# EAGLE board node (EAGLE 9.2.2)
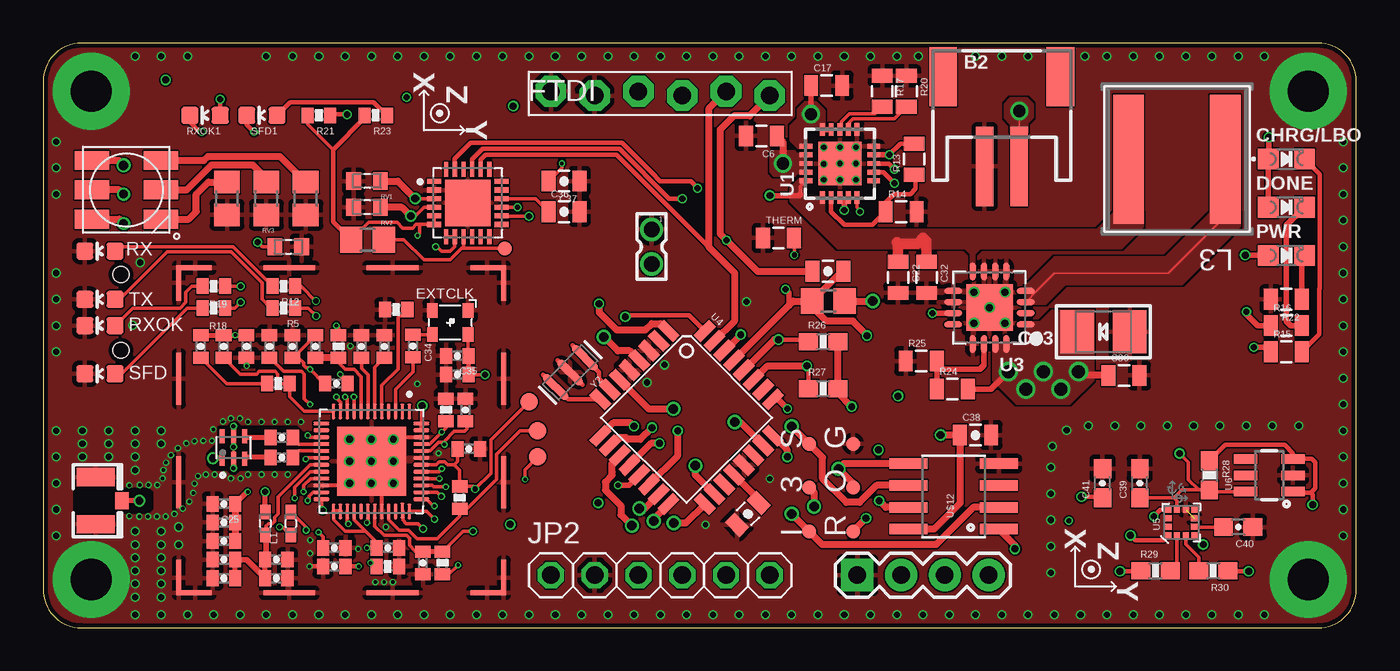
[diagram p0: board, top side]
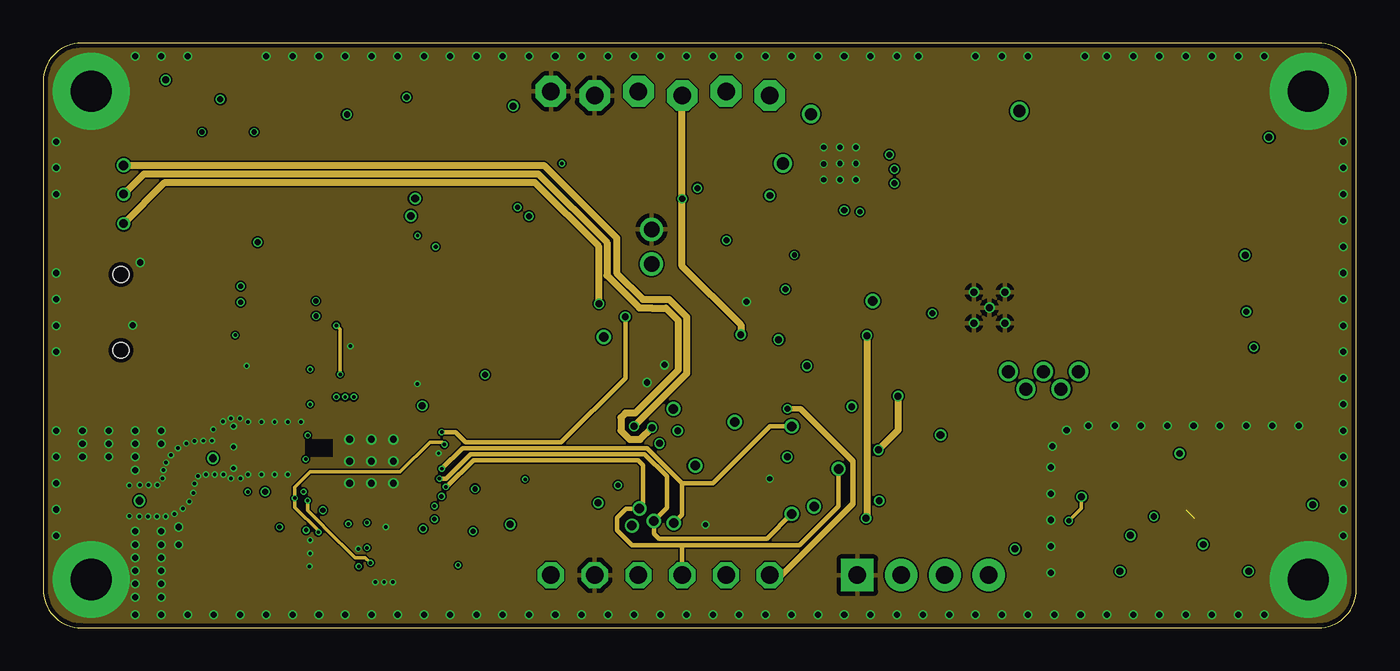
[diagram p1: board, inner layer Route2]
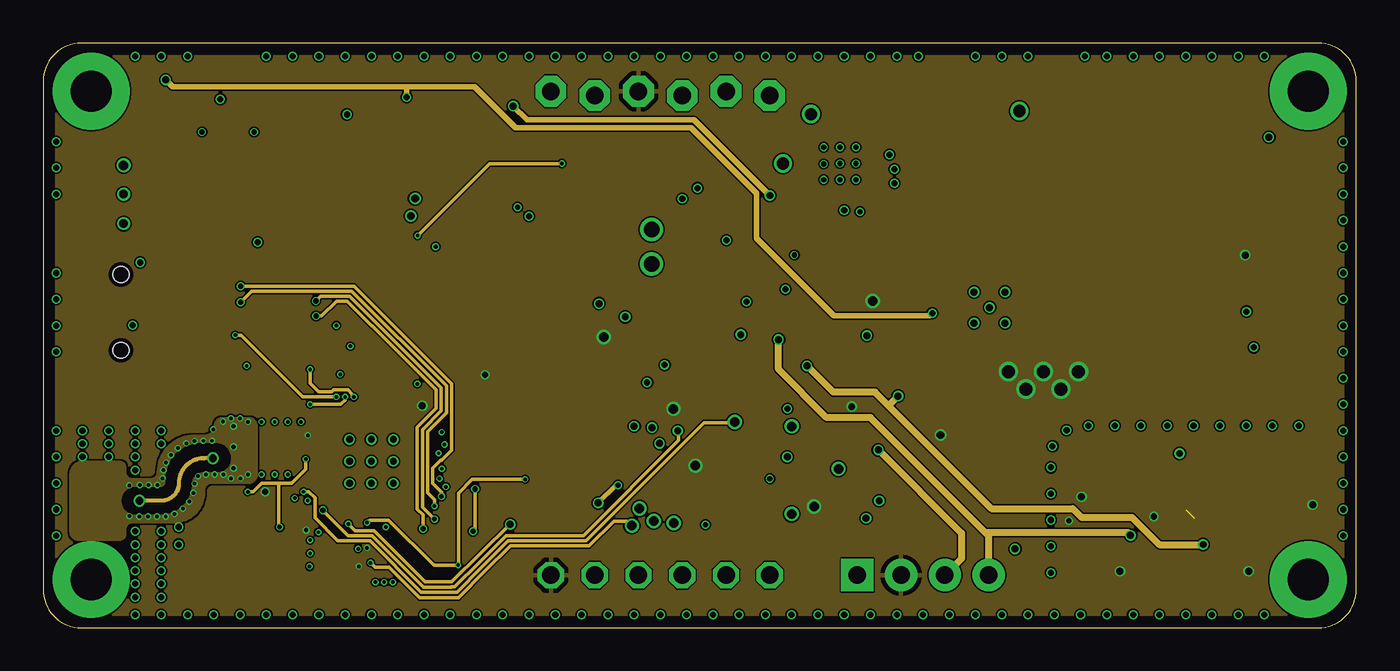
[diagram p2: board, inner layer Route15]
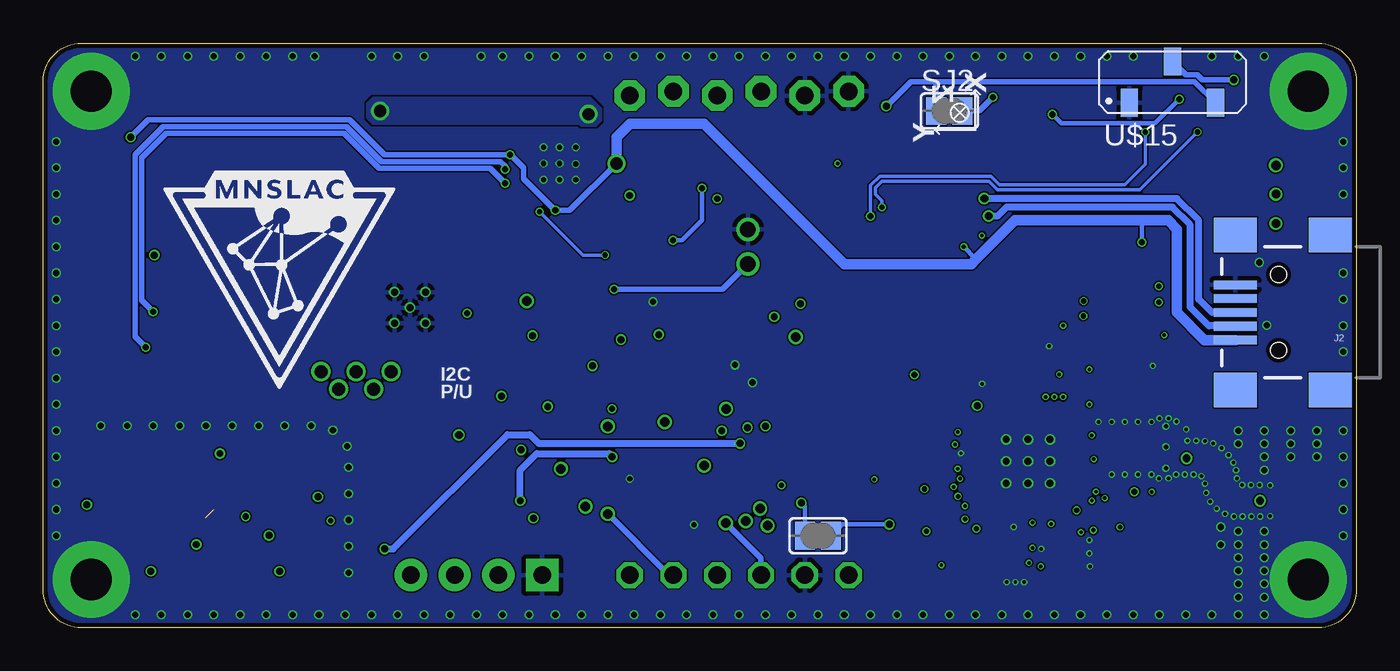
[diagram p3: board, bottom side, seen from below]

Size 76.2 x 33.91 mm. Coordinates in mm from the lower left corner, seen from the top.
Outline: 2.22,0 73.98,0 arc90 76.2,2.22 76.2,31.69 arc90 73.98,33.91 2.22,33.91 arc90 0,31.69 0,2.22 arc90 2.22,0
Copper layers (1+2*15+16): Top 0.035mm / dielectric 0.2mm / Route2 0.0175mm / dielectric 1.065mm / Route15 0.0175mm / dielectric 0.2mm / Bottom 0.035mm
Design rules "default *": minimum track width 3.5mil, minimum drill 0.2mm, track to track 3.5mil, track to pad 6mil, pad to pad 6mil, via to via 6mil, smd to smd 6mil, copper to edge 10mil, drill to drill 6mil, minimum pad ring 3mil, minimum via ring 3mil, stop-mask expansion 4mil, vias tented up to drill 0mil, thermal gap 10mil
Net classes: 1 single: width 0.293 mm, clearance 0.203 mm; 2 double: width 0.192 mm, clearance 0.178 mm; 3 ant: width 0.235 mm, clearance 0.203 mm

## Footprints (pad centres in the part's own frame; a part is rotated, then mirrored left to right if it is on the bottom)
TP08R = smd 0.8 x 0.8: TP 0,0
JSTPH2 = smd 1 x 4.6: 1 -1,-3.7; 2 1,-3.7 | smd 1.6 x 3.4: NC1 -3.4,1.5; NC2 3.4,1.5
BALUN_HHM1595A1 = smd 0.8 x 0.3: 1 -0.65,0.65; 2 -0.65,0; 3 -0.65,-0.65; 4 0.65,-0.65; 5 0.65,0; 6 0.65,0.65
0805-CAP = smd 0.8 x 1.2: 1 -0.9,0; 2 0.9,0
0402-CAP = smd 0.7 x 0.9: 1 -0.65,0; 2 0.65,0
0805 = smd 0.8 x 1.2: 1 -0.9,0; 2 0.9,0
EIA3528-21/B-R = smd 1.95 x 2.5: + 1.525,0; - -1.525,0
0603-CAP = smd 1.1 x 1: 1 -0.85,0; 2 0.85,0
CHIPLED_0805_NOOUTLINE = smd 1.2 x 1.2: A 0,-1.05; C 0,1.05
ASTXR-12 = smd 0.63 x 0.85: P$1 -1.04,-0.7; P$3 1.04,-0.7; P$4 1.04,0.7; P$6 -1.04,0.7
1X06-BIGLOCK = drill 1.016 pad 1.778 octagon: 1 -6.35,0.127; 2 -3.81,-0.127; 3 -1.27,0.127; 4 1.27,-0.127; 5 3.81,0.127; 6 6.35,-0.127
U.FL = smd 2.2 x 1.05: 1 0,1.375; 2 0,-1.375 | smd 0.8 x 1: 3 1.525,0
USB-MINIB = smd 2.5 x 0.5: D+ 2.5,0; D- 2.5,0.8; GND 2.5,-1.6; ID 2.5,-0.8; VBUS 2.5,1.6 | smd 2.5 x 2: MTN1 -3,4.5; MTN2 2.5,4.5; MTN3 -3,-4.5; MTN4 2.5,-4.5 | hole 0.9: 0,2.2; 0,-2.2
1X04 = drill 1.016 pad 1.88 square: 1 0,0 | drill 1.016 pad 1.88: 2 2.54,0; 3 5.08,0; 4 7.62,0
1X06 = drill 1.016 octagon: 1 -6.35,0; 2 -3.81,0; 3 -1.27,0; 4 1.27,0; 5 3.81,0; 6 6.35,0
WE-CBA_0402(W=2.2) = smd 0.85 x 0.6: 1 -0.675,0; 2 0.675,0
IND_TAIYO_NR8040 = smd 1.791 x 7.493: 1 -2.8,0; 2 2.8,0
RGBLED5050 = smd 2 x 1.1: 1 -2,1.7; 2 -2,0; 3 -2,-1.7; 4 2,-1.7; 5 2,0; 6 2,1.7
R0805 = smd 1.3 x 1.5: 1 -0.95,0; 2 0.95,0
0402-RES = smd 0.7 x 0.9: 1 -0.65,0; 2 0.65,0
0603-RES = smd 1.1 x 1: 1 -0.85,0; 2 0.85,0
WESURGE_0603_REFLOW = smd 0.85 x 1: 1 -0.775,0; 2 0.775,0
LED-0603 = smd 1 x 1: A 0,-0.877; C 0,0.877
SJ = smd 1.168 x 1.6: 1 -0.762,0; 2 0.762,0
PAD.03X.04 = smd 1.016 x 1.016: P$1 0,0
TP_15TH = drill 0.381 pad 0.61: P$1 0,0
QFN20_4MM = smd 0.73 x 0.28: P$1 -1.965,1; P$2 -1.965,0.5; P$3 -1.965,0; P$4 -1.965,-0.5; P$5 -1.965,-1; P$11 1.965,-1; P$12 1.965,-0.5; P$13 1.965,0; P$14 1.965,0.5; P$15 1.965,1 | smd 0.28 x 0.73: P$6 -1,-1.965; P$7 -0.5,-1.965; P$8 0,-1.965; P$9 0.5,-1.965; P$10 1,-1.965; P$16 1,1.965; P$17 0.5,1.965; P$18 0,1.965; P$19 -0.5,1.965; P$20 -1,1.965 | smd 2.5 x 2.5: P$21 0,0
QFN40P600X600X90-49N = smd 0.91 x 0.22: 1 -2.9,2.2; 2 -2.9,1.8; 3 -2.9,1.4; 4 -2.9,1; 5 -2.9,0.6; 6 -2.9,0.2; 7 -2.9,-0.2; 8 -2.9,-0.6; 9 -2.9,-1; 10 -2.9,-1.4; 11 -2.9,-1.8; 12 -2.9,-2.2; 25 2.9,-2.2; 26 2.9,-1.8; 27 2.9,-1.4; 28 2.9,-1; 29 2.9,-0.6; 30 2.9,-0.2; 31 2.9,0.2; 32 2.9,0.6; 33 2.9,1; 34 2.9,1.4; 35 2.85,1.8; 36 2.9,2.2 | smd 0.22 x 0.91: 13 -2.2,-2.9; 14 -1.8,-2.9; 15 -1.4,-2.9; 16 -1,-2.9; 17 -0.6,-2.9; 18 -0.2,-2.9; 19 0.2,-2.9; 20 0.6,-2.9; 21 1,-2.9; 22 1.4,-2.9; 23 1.8,-2.9; 24 2.2,-2.9; 37 2.2,2.9; 38 1.8,2.9; 39 1.4,2.9; 40 1,2.9; 41 0.6,2.9; 42 0.2,2.9; 43 -0.2,2.9; 44 -0.6,2.9; 45 -1,2.9; 46 -1.4,2.9; 47 -1.8,2.9; 48 -2.2,2.9 | smd 4 x 4: 49 0,0
PVQFN-16 = smd 1.05 x 0.35: 1 -2.1,0.975; 2 -2.1,0.325; 3 -2.1,-0.325; 4 -2.1,-0.975; 9 2.1,-0.975; 10 2.1,-0.325; 11 2.1,0.325; 12 2.1,0.975 | smd 0.35 x 1.05: 5 -0.975,-2.1; 6 -0.325,-2.1; 7 0.325,-2.1; 8 0.975,-2.1; 13 0.975,2.1; 14 0.325,2.1; 15 -0.325,2.1; 16 -0.975,2.1 | drill 0.4: P$18 0,0; P$19 -0.9,0.9; P$20 0.9,0.9; P$21 0.9,-0.9; P$22 -0.9,-0.9 | smd 2.7 x 2.7: THERMAL 0,0
TQFP32-08 = smd 1.27 x 0.559: 1 -4.293,2.8; 2 -4.293,2; 3 -4.293,1.2; 4 -4.293,0.4; 5 -4.293,-0.4; 6 -4.293,-1.2; 7 -4.293,-2; 8 -4.293,-2.8; 17 4.293,-2.8; 18 4.293,-2; 19 4.293,-1.2; 20 4.293,-0.4; 21 4.293,0.4; 22 4.293,1.2; 23 4.293,2; 24 4.293,2.8 | smd 0.559 x 1.27: 9 -2.8,-4.293; 10 -2,-4.293; 11 -1.2,-4.293; 12 -0.4,-4.293; 13 0.4,-4.293; 14 1.2,-4.293; 15 2,-4.293; 16 2.8,-4.293; 25 2.8,4.293; 26 2,4.293; 27 1.2,4.293; 28 0.4,4.293; 29 -0.4,4.293; 30 -1.2,4.293; 31 -2,4.293; 32 -2.8,4.293
LGA-12 = smd 0.375 x 0.35: 1 -0.75,0.75; 2 -0.75,0.25; 3 -0.75,-0.25; 4 -0.75,-0.75; 7 0.75,-0.75; 8 0.75,-0.25; 9 0.75,0.25; 10 0.75,0.75 | smd 0.35 x 0.375: 5 -0.25,-0.75; 6 0.25,-0.75; 11 0.25,0.75; 12 -0.25,0.75
SOT23-6 = smd 0.55 x 1.35: 1 -0.95,-1.375; 2 0,-1.375; 3 0.95,-1.375; 4 0.95,1.375; 5 0,1.375; 6 -0.95,1.375
SMS-255F = smd 0.3 x 2.06: P$1 0,0.88; P$6 18.85,0.88; P$7 18.85,17.97; P$12 0,17.97 | smd 1.91 x 0.3: P$2 0.955,0; P$5 17.886,0; P$8 17.886,18.85; P$11 0.955,18.85 | smd 3 x 0.3: P$3 6.41,0; P$4 12.41,0; P$9 12.41,18.85; P$10 6.41,18.85 | smd 0.3 x 3: P$13 0,6.41; P$14 0,12.41; P$15 18.85,12.41; P$16 18.85,6.41
QFN50P400X400X80-25N = smd 0.82 x 0.26: 1 -1.955,1.25; 2 -1.955,0.75; 3 -1.955,0.25; 4 -1.955,-0.25; 5 -1.955,-0.75; 6 -1.955,-1.25; 13 1.955,-1.25; 14 1.955,-0.75; 15 1.955,-0.25; 16 1.955,0.25; 17 1.955,0.75; 18 1.955,1.25 | smd 0.26 x 0.82: 7 -1.25,-1.955; 8 -0.75,-1.955; 9 -0.25,-1.955; 10 0.25,-1.955; 11 0.75,-1.955; 12 1.25,-1.955; 19 1.25,1.955; 20 0.75,1.955; 21 0.25,1.955; 22 -0.25,1.955; 23 -0.75,1.955; 24 -1.25,1.955 | smd 2.65 x 2.68: 25 0,0
SOIC-8 = smd 0.61 x 2.21: 1 -1.905,-2.616; 2 -0.635,-2.616; 3 0.635,-2.616; 4 1.905,-2.616; 5 1.905,2.616; 6 0.635,2.616; 7 -0.635,2.616; 8 -1.905,2.616
JS102011JCQN = smd 1 x 1.6: P$1 -2.5,-1.2; P$2 0,1.2; P$3 2.5,-1.2
332-02 = drill 0.9 pad 1.27: 1 0,-1; 2 0,1
RESONATOR-SMD = smd 0.45 x 1.905: 1 -1.2,0; 2 0,0; 3 1.2,0

## Placement (x,y rotation side)
3  TPSQTP08R  [TP08R]  44.45,8.13 90 top
B2  JST 2-PH  [JSTPH2]  55.63,30.45 0 top
BALUN1  HHM1595A1  [BALUN_HHM1595A1]  11.05,10.45 90 top
C1  0.1uF  [0805-CAP]  45.54,20.68 0 top
C2  0.1uF  [0805-CAP]  40.89,6.6 225 top
C3  0.1uF  [0402-CAP]  24.04,14.68 180 top
C4  0.1uF  [0402-CAP]  22.03,3.76 270 top
C5  0.1uF  [0402-CAP]  24.51,12.64 90 top
C6  10uF  [0805]  41.68,28.52 180 top
C7  0.1uF  [0402-CAP]  14.48,16.32 90 top
C8  0.1uF  [0402-CAP]  19.81,16.32 90 top
C9  0.1uF  [0402-CAP]  18.48,16.32 90 top
C10  0.1uF  [0402-CAP]  16.89,4.64 0 top
C11  0.1uF  [0402-CAP]  11.81,16.32 270 top
C12  0.1uF  [0402-CAP]  13.14,16.32 90 top
C13  12pf  [0402-CAP]  13.84,11.02 0 top
C14  12pf  [0402-CAP]  13.84,9.88 0 top
C15  18pF  [0402-CAP]  10.48,16.32 270 top
C16  820pF  [0402-CAP]  9.14,16.32 270 top
C17  10uF  [0805]  45.47,31.45 0 top
C18  1p2  [0402-CAP]  15.81,16.32 270 top
C19  27pF  [0402-CAP]  17.02,14.16 0 top
C20  0.1uF  [0402-CAP]  24.7,10.38 180 top
C21  0.1uF  [0402-CAP]  20,4.64 0 top
C22  10uF  [0805]  49.61,20.32 270 top
C23  12nF  [0402-CAP]  10.49,5.03 180 top
C24  330nF  [0402-CAP]  10.49,6.11 180 top
C25  100nF  [0402-CAP]  10.49,7.19 180 top
C26  47uF  [0402-CAP]  16.89,3.56 0 top
C27  12nF  [0402-CAP]  13.53,3.95 0 top
C28  330nF  [0402-CAP]  10.49,2.87 180 top
C29  100nF  [0402-CAP]  10.49,3.95 180 top
C30  2.2uF  [0805]  62.71,14.63 0 top
C31  22uF  [0402-CAP]  13.53,2.87 0 top
C32  0.1uF  [0805]  51.26,20.32 270 top
C33  100uF/6V - https://www.digikey.com/product-detail/en/avx-corporation/F930G107MBA/478-8135-1-ND/4005827  [EIA3528-21/B-R]  61.52,17.17 180 top
C34  2200pF  [0402-CAP]  21.46,16.33 90 top
C35  100nF  [0402-CAP]  24.03,15.77 0 top
C36  4.7uF  [0805-CAP]  30.23,24.13 0 top
C37  2uF  [0805-CAP]  30.23,25.91 180 top
C38  1uF  [0805-CAP]  54.1,11.18 0 top
C39  0.1uF  [0603-CAP]  63.63,8.38 90 top
C40  0.1uF  [0603-CAP]  69.34,5.84 180 top
C41  0.1uF  [0603-CAP]  61.47,8.38 90 top
CHRG/LBO  ORANGE  [CHIPLED_0805_NOOUTLINE]  72.14,27.18 270 top
CPRST  TPSQTP08R  [TP08R]  26.8,22 0 top
DONE  GREEN  [CHIPLED_0805_NOOUTLINE]  72.14,24.38 270 top
EXTCLK  38.400MHz  [ASTXR-12]  23.62,17.7 180 top
FTDI  [1X06-BIGLOCK]  35.81,30.99 0 top
G  TPSQTP08R  [TP08R]  46.99,10.67 90 top
I  TPSQTP08R  [TP08R]  44.45,5.59 90 top
J1  U.FL  [U.FL]  3.05,7.37 0 top
J2  USBSMD  [USB-MINIB]  4.52,18.29 180 bottom
JP1  [1X04]  47.24,3.05 0 top
JP2  [1X06]  35.81,3.05 0 top
L1  BLM15AG601SN1D  [WE-CBA_0402(W=2.2)]  14.38,6.05 90 top
L2  BLM15AG601SN1D  [WE-CBA_0402(W=2.2)]  12.89,6.05 90 top
L3  NR8040T6R8N  [IND_TAIYO_NR8040]  65.79,27.18 180 top
LED1  RGBLED5050  [RGBLED5050]  4.83,25.4 0 top
O  TPSQTP08R  [TP08R]  46.99,8.13 90 top
PWR  GREEN  [CHIPLED_0805_NOOUTLINE]  72.14,21.59 270 top
R  TPSQTP08R  [TP08R]  46.99,5.59 90 top
R1  100  [R0805]  12.95,24.89 90 top
R2  100  [R0805]  15.24,24.89 90 top
R3  100  [R0805]  10.67,24.89 90 top
R4  10K  [0402-RES]  20,3.56 0 top
R5  470  [0402-RES]  13.97,18.54 180 top
R6  11K 1%  [0402-RES]  20.49,18.45 0 top
R7  100K  [0402-RES]  23.38,12.64 270 top
R8  10k  [0402-RES]  24.17,7.54 270 top
R9  10k  [0402-RES]  23.18,3.76 270 top
R10  270  [0402-RES]  13.65,14.16 0 top
R11  16k  [0402-RES]  17.14,16.32 270 top
R12  470  [0402-RES]  13.97,19.81 180 top
R13  270K  [0805]  50.55,27.18 90 top
R14  100K  [0805]  49.78,24.13 0 top
R15  1K  [0805]  72.14,16 0 top
R16  1K  [0805]  72.14,17.53 0 top
R17  2.0K  [0805]  48.69,31.11 270 top
R18  470  [0402-RES]  9.91,18.54 180 top
R19  470  [0402-RES]  9.91,19.81 180 top
R20  100K  [0805]  50.09,31.11 270 top
R21  470  [0402-RES]  16,29.72 180 top
R22  1K  [0805]  72.14,19.05 180 top
R23  470  [0402-RES]  19.3,29.72 180 top
R24  1.15M  [0805]  52.76,13.84 0 top
R25  205K  [0805]  50.95,15.47 0 top
R26  4.7K  [0603-RES]  45.26,16.59 0 top
R27  4.7K  [0603-RES]  45.26,13.87 0 top
R28  68  [0603-RES]  67.67,8.84 270 top
R29  10K  [0603-RES]  64.54,3.3 0 top
R30  10K  [0603-RES]  67.89,3.3 180 top
RST  10k  [R0805]  45.57,18.95 0 top
RST1  4.7K  [R0805]  18.82,22.5 180 top
RV1  WE-VE_0603_REFLOW  [WESURGE_0603_REFLOW]  18.8,25.91 180 top
RV2  WE-VE_0603_REFLOW  [WESURGE_0603_REFLOW]  18.8,24.38 180 top
RV3  WE-VE_0603_REFLOW  [WESURGE_0603_REFLOW]  14.22,22.1 0 top
RX  [LED-0603]  3.3,21.84 90 top
RXOK  [LED-0603]  3.3,17.53 90 top
RXOK1  [LED-0603]  9.4,29.72 90 top
S  TPSQTP08R  [TP08R]  44.45,10.67 90 top
SFD  [LED-0603]  3.3,14.73 90 top
SFD1  [LED-0603]  12.7,29.72 90 top
SJ1  [SJ]  31.24,5.33 0 bottom
SJ2  [SJ]  23.62,29.97 0 bottom
THERM  15K  [0805]  42.67,22.61 0 top
TP1  TEST-POINT3X4  [PAD.03X.04]  28.7,11.43 90 top
TP2  TEST-POINT3X4  [PAD.03X.04]  28.7,9.91 90 top
TP3  VDD_TP  [TP_15TH]  65.94,10.11 90 top
TP3-OTP  TEST-POINT3X4  [PAD.03X.04]  28.19,13.11 90 top
TX  [LED-0603]  3.3,19.05 90 top
U1  MCP73871  [QFN20_4MM]  46.23,26.92 90 top
U2  DW1000-I  [QFN40P600X600X90-49N]  19.05,9.65 270 top
U3  TPS61090RSAR  [PVQFN-16]  54.91,18.57 180 top
U4  ATMEGA328  [TQFP32-08]  37.34,12.19 315 top
U5  LSM303C  [LGA-12]  66.04,6.1 90 top
U6  LM3880  [SOT23-6]  71.15,8.84 90 top
U$1  MNSLAC0.25  [MNSLAC-0.25]  69.22,25.53 0 bottom
U$6  SMS-255F  [SMS-255F]  7.87,2.03 0 top
U$7  HEATSINK  [LTN20069]  24.38,4.57 0 bottom
U$8  CP2105  [QFN50P400X400X80-25N]  24.64,24.64 0 top
U$12  23A640  [SOIC-8]  52.83,7.62 90 top
U$15  SWITCH_SPDTJS102011JCQN  [JS102011JCQN]  10.67,31.65 0 bottom
X2  332-02  [332-02]  35.31,22.1 180 top
Y2  8MHZ  [RESONATOR-SMD]  30.58,14.81 225 top

## Library data of the parts
3 CPRST G I O R S = testpad
B2 C33 CHRG/LBO DONE PWR U1 U3 = microbuilder
BALUN1 = MainLib; DESCRIPTION: Baluns 50/100ohm, 3-8GHz Ultrawideband Balun; DIGI-KEY_PART_NUMBER: 445-3387-1-ND; DIGI-KEY_PURCHASE_URL: https://www.digikey.com/product-detail/en/tdk-corporation/HHM1595A1/445-3387-1-ND/1641780?utm_source=snapeda&utm_medium=aggregator&utm_campaign=symbol; MF: TDK; MP: HHM1595A1; PACKAGE: 0805 TDK
C1 C2 C36-C38 = SparkFun-Capacitors; PROD_ID: CAP-11625
C3-C32 C34 C35 R4-R25 THERM TP1-TP3 TP3-OTP = SparkFun-Passives
C39-C41 = SparkFun-Capacitors; PROD_ID: CAP-00810
EXTCLK U$1 U$6-U$8 U$12 U$15 = MainLib
FTDI J1 JP2 LED1 = adafruit
J2 = SparkFun-Connectors; PROD_ID: CONN-08193
JP1 = SparkFun-Connectors
L1 L2 RV1-RV3 = Wurth_Elektronik_Passive_rev15e
L3 = MainLib; MANUFACTURER_PART_NUMBER: NR8040T6R8N; VENDOR: TAIYO YUDEN
R1-R3 RST RST1 = resistor
R26 R27 = SparkFun-Resistors; PROD_ID: RES-07857
R28 = SparkFun-Passives; PROD_ID: RES-07860
R29 R30 = SparkFun-Resistors; PROD_ID: RES-00824
RX RXOK RXOK1 SFD SFD1 TX = SparkFun-LED
SJ1 SJ2 = jumper
U2 = MainLib; AVAILABILITY: Unavailable; DESCRIPTION: Ic Rf Txrx 802.15.4 48-Qfn; MF: Decawave Limited; MP: DW1000-I; PACKAGE: QFN-48 Decawave; PRICE: None
U4 = SparkFun
U5 = SparkFun-DigitalIC; PROD_ID: IC-12557
U6 = SparkFun-DigitalIC; PROD_ID: IC-12558
X2 = con-garry
Y2 = SparkFun-FreqCtrl; PROD_ID: XTAL-08895

## Nets
3.3V: 3.TP C3.1 C21.1 C26.2 C30.1 C33.+ C35.2 C38.1 C41.1 EXTCLK.P$6 FTDI.3 JP1.2 JP2.1 L1.2 L2.2 PWR.A R24.2 R26.2 R27.2 R28.1 R29.1 R30.1 RST.2 U2.15 U2.25 U2.26 U2.28 U2.47 U2.48 U3.1 U3.15 U3.16 U4.4 U4.6 U4.18 U5.10 U6.1 U6.3 U$12.8
!CS_MAG: R30.2 U5.3
!CS_XL: R29.2 U5.2
!EXTCS: JP2.6 U4.25
!RST: SJ1.2 U2.27
!SPICS: U2.24 U4.14
!SRAMCS: U4.12 U$12.1
!SRAMHOLD: U4.24 U$12.7
A3: U4.26
A6: U4.19
A7: U4.22
ANT [ant]: BALUN1.1 J1.3
AREF: C2.1 U4.20
BAL_N [single]: BALUN1.3 C14.1
BAL_P [single]: BALUN1.4 C13.1
BLU: LED1.3 U4.1
CLKTUNE: C18.2 R11.2 U2.8
CPVIO: C37.2 R21.2 R23.2 RST1.2 U$8.5 U$8.6
D4: U4.2
D+: J2.D+ RV1.1 U$8.3
D-: J2.D- RV2.1 U$8.4
DRDY_MAG: U5.11
DTR: C1.1 FTDI.6 U$8.23
DWRST: SJ1.1 U4.13
EXTON: U2.21 U4.23
GND: B2.1 BALUN1.2 BALUN1.5 C2.2 C3.2 C4.2 C5.2 C6.2 C7.2 C8.2 C9.2 C10.2 C11.2 C12.2 C17.2 C20.1 C21.2 C22.2 C23.2 C24.2 C25.2 C26.1 C27.2 C28.2 C29.2 C30.2 C31.2 C32.2 C33.- C35.1 C36.2 C37.1 C38.2 C39.2 C40.1 C41.2 EXTCLK.P$1 EXTCLK.P$3 FTDI.1 FTDI.2 G.TP J1.1 J1.2 J2.GND JP1.1 JP2.2 R1.1 R2.1 R3.1 R4.2 R6.1 R7.1 R14.2 R17.1 R20.1 R22.2 R25.1 RV1.2 RV2.2 RV3.2 RX.C RXOK.C SFD.C THERM.1 TX.C U1.P$10 U1.P$11 U1.P$21 U2.22 U2.32 U2.43 U2.46 U2.49 U3.5 U3.6 U3.7 U3.9 U3.10 U3.13 U3.P$18 U3.P$19 U3.P$20 U3.P$21 U3.P$22 U3.THERMAL U4.3 U4.5 U4.21 U5.6 U5.8 U6.2 U$6.P$1 U$6.P$2 U$6.P$3 U$6.P$4 U$6.P$5 U$6.P$6 U$6.P$7 U$6.P$8 U$6.P$9 U$6.P$10 U$6.P$11 U$6.P$12 U$6.P$13 U$6.P$14 U$6.P$15 U$6.P$16 U$8.2 U$8.25 U$12.4 U$15.P$1 X2.1 Y2.2
GPIO0: R19.1 U2.38
GPIO1: R18.1 U2.37
GPIO2: R12.1 U2.36
GPIO3: R5.1 U2.35
GPIO4: U2.34
GPIO5: R8.2 TP1.P$1 U2.33
GPIO6: R9.2 TP2.P$1 U2.30
GRN: LED1.1 U4.9
IQR: R7.2 U2.45 U4.32
MISO: I.TP JP2.5 U2.40 U4.16 U$12.2
MOSI: JP2.4 O.TP U2.39 U4.15 U$12.5
N$1: U4.8 Y2.3
N$2: LED1.5 R1.2
N$3: LED1.6 R2.2
N$4: LED1.4 R3.2
N$5: R5.2 TX.A
N$6: R12.2 RX.A
N$7: C16.2 R10.1
N$8: R13.1 R14.1 U1.P$2
N$9: U4.7 Y2.1
N$10: C5.1 C10.1 U2.20 U2.44
N$11: R16.1 U1.P$7
N$12: R15.1 U1.P$8
N$13: THERM.2 U1.P$5
N$14: C19.2 R11.1
N$15: DONE.C R16.2
N$16: R17.2 U1.P$13
N$17: CHRG/LBO.C R15.2
N$18: R20.2 U1.P$12
N$19: CPRST.TP RST1.1 U$8.9
N$20: L3.1 U3.3 U3.4
N$21: R18.2 SFD.A
N$22: PWR.C R22.1
N$23: R24.1 R25.2 U3.14
N$24: R19.2 RXOK.A
N$25: C34.1 U2.3
N$26: C34.2 EXTCLK.P$4
N$27: U2.4
N$28: C40.2 U5.5
N$29: C36.1 U$8.16
N$30: SJ2.2 U3.11 U$15.P$2
N$31: R21.1 RXOK1.A
N$32: R23.1 SFD1.A
RED: LED1.2 U4.10
RESET: C1.2 R.TP RST.1 U4.29 X2.2
RF_N [double]: C14.2 U2.17
RF_P [double]: C13.2 U2.16
RX_LED: SFD1.C U$8.14
RXD: FTDI.4 U4.30 U$8.21
SCK: JP2.3 S.TP U2.41 U4.17 U$12.6
SCL: JP1.4 R26.1 U4.28 U5.1
SDA: JP1.3 R27.1 U4.27 U5.4
SYNC: U2.29
TX_LED: RXOK1.C U$8.15
TXD: FTDI.5 U4.31 U$8.20
VBUS: C6.1 CHRG/LBO.A DONE.A J2.VBUS R13.2 RV3.1 U1.P$3 U1.P$4 U1.P$9 U1.P$17 U1.P$18 U1.P$19 U$8.7 U$8.8
VCC-ISO: C22.1 C32.1 L3.2 SJ2.1 U1.P$1 U1.P$20 U3.8 U$15.P$3
VCOTUNE: C15.2 R10.2 U2.12
VDDCLK: C7.1 C18.1 C19.1 U2.9
VDDIF: C9.1 U2.7
VDDIO: C4.1 C20.2 R8.1 R9.1 TP3-OTP.P$1 U2.31 U2.42
VDDMS: C8.1 U2.6
VDDPA1: C23.1 C24.1 C25.1 L1.1 U2.18
VDDPA2: C27.1 C28.1 C29.1 C31.1 L2.1 U2.19
VDDSYN: C12.1 U2.10
VDDVCO: C11.1 C15.1 C16.1 U2.11
VDELAY: C39.1 R28.2 TP3.P$1 U5.9 U6.6
VLIPO: B2.2 C17.1 U1.P$14 U1.P$15 U1.P$16
VREF: R6.2 U2.5
WAKEUP: R4.1 U2.23 U4.11

## Tracks (layer width: path | path; a pad name or v marks a point on that pad's centre or on a via)
3.3V  (via drill 0.2, 0.25, 0.3, 0.35, 0.4, 0.45, 0.55, 0.75)
  Top 0.203: U2.15 15.46,11.05 v15.35,11.16 | U2.48 21.95,12.92 v22,12.88 | U2.25 16.85,6.26 17.53,5.59 18.73,5.59 | U2.28 18.05,6.26 18.73,5.59 | 19.35,4.92 19.35,4.96 18.73,5.59 | L1.2 15.27,5.83 v15.27,5.66 | EXTCLK.P$6 24.66,15.81 arc45 C35.2 | v25.65,14.68 C3.1
  Top 0.254: U2.25 U2.26 | U2.47 U2.48 | 19.35,4.92 C21.1 v18.8,4.64 | C26.2 v18.32,3.56 | 73.56,7.82 73.81,8.08 73.81,9.6 73.62,9.79 U6.3 72.52,10.13 72.03,10.62 68.59,10.62 R28.1 | 73.56,7.82 72.59,7.82 U6.1 | v73.66,7.14 73.66,7.72 73.56,7.82 | v69.95,3.28 68.77,3.28 R30.1 | v62.48,3.28 63.67,3.28 R29.1 | C41.1 61.41,7.59 v60.25,7.59 | v64.44,6.45 64.83,6.85 U5.10 | C3.1 24.69,15.78 24.66,15.81
  Top 0.293: L2.2 v12.89,7.89
  Top 0.305: v69.75,21.61 71.06,21.61 PWR.A | R24.2 54.99,13.84 v56.01,14.86
  Top 0.406: RST.2 v48.13,18.95 | 3.TP 44.73,7.85 v44.73,7.04 | U4.18 37.85,8.86 v37.85,9.4 | U4.6 35.13,12.7 v36.58,12.7 | U4.4 34.04,16.05 33.35,16.05 v32.54,16.87 | v46.91,12.83 46.11,13.63 R27.2 R26.2 | U$12.8 51.69,5.71 53.2,7.23 C38.1 v52.07,11.18 | C30.1 60.3,14.63 v60.07,14.86
  Route2 0.203: v60.25,7.59 60.25,6.93 v59.51,6.2
  other vias: 58.04,14.86 59.05,13.84 57.02,13.84
  pour Route15 (rank 2): 0.76,3.05 0.76,30.86 arc-90 3.05,33.15 73.15,33.15 arc-90 75.44,30.86 75.44,3.05 arc-90 73.15,0.76 3.05,0.76 arc-90
  pour Top (no thermals): 60.99,18.41 58.5,18.41 57.84,17.75 56.97,17.75 56.97,16.54 55.07,16.54 55.07,14.35 56.46,12.95 59.59,12.95 60.99,14.35
!CS_MAG
  Top 0.203: U5.3 66.29,4.83 67.04,4.08 R30.2
!CS_XL
  Top 0.203: U5.2 65.79,3.7 R29.2
!EXTCS  (via drill 0.35)
  Top 0.305: U4.25 42.63,13.25 v43.18,12.7
  Route2 0.305: v43.18,12.7 43.94,12.7 46.99,9.65 46.99,7.2 42.84,3.05 JP2.6
!RST  (via drill 0.2, 0.4)
  Top 0.203: U2.27 17.65,6.09 v17.71,6.03
  Route15 0.203: v17.71,6.03 18.11,5.63 19.2,5.63 22.17,2.66 23.71,2.66 v27.1,5.99
  Bottom 0.254: SJ1.2 29.82,5.99 v27.1,5.99
!SPICS  (via drill 0.3, 0.4)
  Top 0.203: U2.24 16.15,6.89 v16.23,6.81
  Top 0.406: U4.14 36.83,9.99 v36.83,11.43
  Route15 0.203: v16.23,6.81 17.7,5.33 19.08,5.33 22.07,2.35 23.69,2.35 23.71,2.37 23.76,2.37 23.88,2.37 23.97,2.46 25.24,3.71 26.87,5.33 31.34,5.33 36.88,10.87 36.88,11.38 v36.83,11.43
!SRAMCS  (via drill 0.4)
  Top 0.406: U$12.1 56.39,4.78 v56.39,4.57 | v35.76,10.69 35.27,10.69 U4.12
  Bottom 0.406: v35.76,10.69 47.45,10.69 47.95,11.2 49.26,11.2 55.88,4.57 v56.39,4.57
!SRAMHOLD  (via drill 0.4)
  Top 0.406: U$12.7 48.9,6.99 v48.51,7.37 | v43.18,9.91 43.18,10.31 U4.24
  Bottom 0.406: v48.51,7.37 48.51,9.14 47.56,10.1 43.36,10.1 v43.18,9.92 v43.18,9.91
ANT  (via drill 0.45)
  Top 0.293: BALUN1.1 10.37,9.83 v9.86,9.83 | v5.59,7.37 J1.3
  Route15 0.235: v9.86,9.83 9.32,9.83 arc90 7.87,8.38 arc-90 6.86,7.37 v5.59,7.37
  cutout Top: 1.78,8.13 6.1,8.13 6.35,7.87 6.35,6.86 6.1,6.6 1.78,6.6
AREF
  Top 0.406: U4.20 41.53,7.43 C2.1
BAL_N
  Top 0.293: C14.1 11.78,9.88 BALUN1.3
BAL_P
  Top 0.293: C13.1 11.78,11.02 BALUN1.4
BLU  (via drill 0.4, 0.5)
  Top 0.406: LED1.3 4.42,23.7 v4.67,23.44 | v32.26,18.8 32.26,18.29 33.27,17.27 34.95,17.27 35.32,17.64 35.85,17.64 U4.1
  Route2 0.406: v4.67,23.44 7.06,25.83 28.52,25.83 32.22,22.14 32.22,18.84 v32.26,18.8
CLKTUNE
  Top 0.203: U2.8 18.45,14.57 18.03,14.99 17.53,14.99 17.14,15.37 R11.2
  Top 0.406: R11.2 C18.2
CPVIO  (via drill 0.2)
  Top 0.203: U$8.5 U$8.6 21.85,23.39 | RST1.2 18.88,23.51 20.53,23.51 20.85,23.18 21.44,23.18 21.65,23.39 21.85,23.39 | 21.85,23.39 21.85,22.87 v21.73,22.75 | v30.1,26.92 30.1,26.68 C37.2 | R21.2 15.35,29.2 16.82,27.74
  Top 0.254: RST1.2 16.82,23.56 16.82,27.74 18.65,29.58 R23.2
  Route15 0.203: v21.73,22.75 25.91,26.92 v30.1,26.92
D+  (via drill 0.45)
  Top 0.203: v21.59,24.89 U$8.3
  Top 0.406: RV1.1 20.57,25.91 v21.59,24.89
  Bottom 0.406: J2.D+ 8.38,18.29 9.14,19.05 9.14,23.62 10.41,24.89 v21.59,24.89
D-  (via drill 0.45)
  Top 0.203: v21.34,23.88 21.59,23.88 22.1,24.39 U$8.4
  Top 0.406: v21.34,23.88 20.83,24.38 RV2.1
  Bottom 0.406: J2.D- 7.04,17.5 8.55,17.5 9.64,18.59 9.64,23.37 10.67,24.4 20.31,24.4 20.83,23.88 v21.34,23.88
DTR  (via drill 0.35)
  Top 0.254: U$8.23 23.89,27.19 24.82,28.12 33.6,28.12 35.56,26.16 35.56,26.14 35.8,25.9 37.58,25.9 v37.97,25.5
  Top 0.406: FTDI.6 41,29.69 40.08,29.69 39.28,28.89 39.28,22.85 v39.65,22.48 41.45,20.68 C1.1
  Bottom 0.254: v37.97,25.5 37.97,23.65 39.14,22.48 v39.65,22.48
DWRST  (via drill 0.3, 0.4)
  Top 0.305: U4.13 33.98,8.27 v33.36,8.27
  Route15 0.254: v32.21,7.24 33.24,8.27 v33.36,8.27
  Bottom 0.254: v32.21,7.24 32,7.04 SJ1.1
EXTON  (via drill 0.2, 0.55)
  Top 0.203: U2.21 15.51,8.65 15.11,8.26 v15.11,7.89
  Top 0.406: v40.13,11.94 40.42,11.94 U4.23
  Route15 0.203: v15.11,7.89 15.42,7.89 15.77,7.53 15.77,6.37 17.1,5.04 18.96,5.04 21.94,2.06 24.01,2.06 25.45,3.5 25.54,3.59 26.99,5.04 31.52,5.04 38.36,11.89 40.08,11.89 v40.13,11.94
GND  (via drill 0.2, 0.25, 0.3, 0.35, 0.4, 2.4 pad 4.45)  (1 unrouted)
  Top 0.152: v11.05,11.68 BALUN1.5 BALUN1.2 v11.05,9.25
  Top 0.203: U2.46 20.45,11.05 v20.32,10.92 | U2.32 19.65,7.71 v20.32,8.38 | U2.22 17.65,8.25 v17.78,8.38
  Top 0.254: C26.1 v15.46,3.56
  other vias: 17.78,10.92 19.05,10.92 19.05,8.38 17.78,9.65 19.05,9.65 20.32,9.65 22.95,10.12 19.89,5.84 15.49,5.08 15.49,4.32 18.29,4.57 20.29,2.64 19.79,2.64 19.28,2.64 12.67,11.94 13.44,11.94 14.2,11.94 14.96,11.94 10.44,11.96 10.9,12.14 11.43,12.14 11.05,10.49 2.79,2.79 2.79,31.11 73.41,31.11 73.41,2.79 0.76,5.33 5.33,0.76 0.76,6.86 0.76,8.38 0.76,9.91 0.76,11.43 75.44,5.33 75.44,6.86 75.44,8.38 75.44,9.91 75.44,11.43 5.33,33.15 6.86,33.15 8.38,33.15 12.95,33.15 14.48,33.15 16,33.15 17.53,33.15 19.05,33.15 20.57,33.15 22.1,33.15 23.62,33.15 25.15,33.15 26.67,33.15 28.19,33.15 29.72,33.15 31.24,33.15 32.77,33.15 34.29,33.15 35.81,33.15 37.34,33.15 38.86,33.15 40.39,33.15 41.91,33.15 43.43,33.15 44.96,33.15 46.48,33.15 48.01,33.15 49.53,33.15 50.8,33.15 54.1,33.15 55.63,33.15 57.15,33.15 60.45,33.15 61.72,33.15 63.25,33.15 64.77,33.15 66.29,33.15 67.82,33.15 69.34,33.15 70.87,33.15 6.86,0.76 8.38,0.76 9.91,0.76 11.43,0.76 12.95,0.76 14.48,0.76 16,0.76 17.53,0.76 19.05,0.76 20.57,0.76 22.1,0.76 23.62,0.76 25.15,0.76 26.67,0.76 28.19,0.76 29.72,0.76 31.24,0.76 32.77,0.76 34.29,0.76 35.81,0.76 37.34,0.76 38.86,0.76 40.39,0.76 41.91,0.76 43.43,0.76 44.96,0.76 46.48,0.76 48.01,0.76 49.53,0.76 51.05,0.76 52.58,0.76 54.1,0.76 55.63,0.76 57.15,0.76 58.67,0.76 60.2,0.76 61.72,0.76 63.25,0.76 64.77,0.76 66.29,0.76 67.82,0.76 69.34,0.76 70.87,0.76 5,8.26 5.61,8.28 6.12,8.28 6.63,8.28 6.93,8.66 6.99,9.14 7.14,9.58 7.42,10.01 7.82,10.41 8.31,10.69 8.79,10.82 9.3,10.85 9.8,10.85 5,6.48 5.59,6.45 6.1,6.45 6.6,6.45 7.11,6.45 7.62,6.6 8.1,6.91 8.48,7.32 8.71,7.82 8.79,8.36 8.99,8.79 9.45,8.89 9.96,8.89 21.72,14.15 5.33,2.54 5.33,4.06 6.86,2.54 6.86,4.06 5.33,4.83 6.86,4.83 5.33,9.91 3.81,9.91 7.87,4.83 7.87,5.84 3.81,10.67 5.33,10.67 5.33,9.14 5.33,5.59 6.86,5.59 6.86,11.43 2.29,10.67 2.29,9.91 0.76,16 0.76,17.53 0.76,19.05 0.76,20.57 0.76,25.15 0.76,26.67 0.76,28.19 75.44,12.95 75.44,14.48 75.44,16 75.44,17.53 75.44,19.05 75.44,20.57 75.44,22.1 75.44,23.62 75.44,25.15 75.44,26.67 75.44,28.19 9.88,11.51 10.46,8.89 10.9,8.66 11.46,8.66 11.89,8.89 11.89,11.94 12.67,8.89 13.44,8.89 14.2,8.89 3.81,11.43 5.33,11.43 2.29,11.43 6.86,10.67 6.86,3.3 5.33,3.3 6.86,1.78 5.33,1.78 11.81,15.19 17.83,16.33 36.07,15.24 35.05,14.22 42.16,8.64 38.43,5.97 40.82,18.9 5.64,21.18 5.21,17.55 45.29,25.98 47.17,25.98 47.17,27.86 45.29,27.86 46.23,25.98 46.23,27.86 45.29,26.9 47.17,26.92 46.23,26.92 58.47,3.2 58.47,4.72 58.47,7.77 58.47,9.3 72.85,11.71 71.32,11.71 69.8,11.71 68.28,11.71 66.75,11.71 65.23,11.71 63.7,11.71 62.18,11.71 60.66,11.71 59.39,11.46 58.57,10.52 58.47,6.25
  pour Top (rank 2): 0,33.91 95,33.91 95,0 0,0
  pour Bottom (rank 2): 0,33.91 95,33.91 95,0 0,0
  pour Route2: 0,33.91 95,33.91 95,0 0,0
  cutout Top (isolate 0.406, no thermals): 16.76,9.91 16.76,10.92 15.49,10.92 14.73,11.68 11.48,11.68 11.23,11.94 10.92,11.94 10.67,11.68 10.19,11.68 10.11,11.61 10.11,10.72 9.47,10.08 9.47,9.47 9.8,9.14 10.67,9.14 10.92,8.89 11.18,8.89 11.43,9.14 14.73,9.14 15.49,9.91
  pour Route15: 9.78,8.38 11.94,8.38 arc90 12.45,8.89 12.45,11.68 arc90 11.94,12.19 10.41,12.19 arc90 9.91,11.68 arc-90 9.4,11.18 8.76,11.18 arc90 6.6,9.02 arc-90 6.22,8.64 5.21,8.64 arc-90 4.83,9.02 4.83,9.27 arc90 4.45,9.65 2.29,9.65 arc90 1.52,8.89 1.52,5.59 arc90 2.03,5.08 4.45,5.08 arc90 4.83,5.46 4.83,5.71 arc-90 5.21,6.1 7.62,6.1 arc90 9.4,7.87 9.4,8 arc-90
  cutout Route15: 9.91,10.67 9.14,10.67 arc90 7.11,8.64 7.11,8.38 arc-90 6.86,8.13 6.6,8.13 5.59,8.13 5.33,8.13 arc90 4.57,7.37 arc90 5.33,6.6 5.59,6.6 6.86,6.6 arc90 8.64,8.38 arc-90 9.32,9.07 9.53,9.07 9.91,9.07 10.13,9.07 arc90 10.9,9.83 arc90 10.06,10.67
  cutout Top: 22.86,16.59 24.38,16.59 24.38,18.82 22.86,18.82
GPIO0  (via drill 0.25, 0.3)
  Top 0.203: U2.38 22.86,7.85 23.09,7.62 v23.11,7.62 | v11.46,19.81 R19.1
  Route15 0.203: v23.11,7.62 23.11,7.85 22.59,8.37 22.59,9.25 23.06,9.72 23.12,9.72 23.69,10.29 23.69,14.16 18.03,19.81 v11.46,19.81
GPIO1  (via drill 0.2, 0.3)
  Top 0.203: U2.37 22.27,7.45 22.61,7.11 22.66,7.11 v22.71,7.06 | v11.46,18.87 11.12,18.54 R18.1
  Route15 0.203: v22.71,7.06 22.71,7.42 22.3,7.83 22.3,11.38 23.4,12.47 23.4,14.04 17.91,19.52 12.1,19.52 v11.46,18.87
GPIO2  (via drill 0.25, 0.3)
  Top 0.203: U2.36 22.25,6.75 v22.71,6.3 | v15.82,18.95 14.96,19.81 R12.1
  Route15 0.203: v22.71,6.3 22.01,7 22.01,11.5 23.11,12.6 23.11,13.91 17.79,19.23 16.1,19.23 v15.82,18.95
GPIO3  (via drill 0.3)
  Top 0.203: U2.35 20.89,6.77 20.89,6.23 21.07,6.04 21.75,6.04 v22.05,5.74 | v15.85,18.09 15.39,18.54 R5.1
  Route15 0.203: v22.05,5.74 22.05,6.55 21.71,6.88 21.71,11.62 22.81,12.72 22.81,13.79 19.08,17.53 19.05,17.53 17.64,18.94 17.02,18.94 16.17,18.09 v15.85,18.09
GPIO5
  Top 0.203: U2.33 20.05,6.26 20.65,5.66 21.2,5.66 21.7,5.16 22.86,5.16 24.17,6.46 R8.2 24.16,6.89 24.09,6.96 24.65,6.96 26.3,8.62 26.3,10.07 27.66,11.43 TP1.P$1
GPIO6  (via drill 0.2)
  Top 0.203: U2.30 18.85,6.15 v18.8,6.1 | v24.08,3.63 23.48,3.03 23.25,3.03 R9.2 | TP2.P$1 27.97,9.18 v27.97,8.6
  Route15 0.203: v27.97,8.6 24.89,8.6 24.09,7.81 24.09,4.41 24.09,3.65 | v24.08,3.63 24.09,3.65 | v18.8,6.1 18.95,6.25 19.43,6.25 20.06,6.25 22.68,3.62 24.09,3.62 24.09,3.65
GRN  (via drill 0.4, 0.55)
  Top 0.406: U4.9 33.07,11.89 34.09,11.89 v34.29,11.68 | LED1.1 4.4,27.1 v4.67,26.82
  Route2 0.406: v4.67,26.82 29.06,26.82 33.27,22.61 33.27,20.57 34.8,19.05 36.32,19.05 37.34,18.03 37.34,14.73 v34.29,11.68
IQR  (via drill 0.2, 0.4)
  Top 0.203: U2.45 22.44,10.65 v23.13,11.34 23.38,11.59 R7.2
  Top 0.254: v33.78,18.03 33.88,18.14 37.47,18.13 U4.32
  Route2 0.254: v33.78,18.03 33.78,14.48 30.06,10.76 24.52,10.76 23.94,11.34 v23.13,11.34
KEEPOUT
  cutout Route2 (isolate 0.406, no thermals): 16.76,10.92 16.76,9.91 15.24,9.91 15.24,10.92
MISO  (via drill 0.2, 0.55)
  Top 0.203: U2.40 v22.99,8.65 v23,8.65
  Top 0.406: U4.16 36.28,7.16 35.44,6.32 v35.44,6.19 | v43.43,6.6 I.TP 45.21,4.83 51.82,4.83 53.98,6.99 U$12.2
  Route2 0.254: v23,8.65 23.38,8.65 24.8,10.07 34.91,10.07 36.21,8.78 36.21,6.96 v35.44,6.19 35.44,5.46 35.73,5.17 42,5.17 v43.43,6.6
  Bottom 0.305: JP2.5 39.88,3.05 v43.43,6.6
MOSI  (via drill 0.2, 0.55)
  Top 0.203: v23.37,8.17 22.65,8.17 22.56,8.25 U2.39
  Top 0.406: v34.6,6.91 34.89,6.91 U4.15 | O.TP 46.99,8.38 v46.15,9.22 46.46,9.53 U$12.5
  Route2 0.254: v23.37,8.17 23.41,8.17 24.97,9.73 34.51,9.73 34.82,9.42 34.82,7.13 v34.6,6.91 34.58,6.89 33.81,6.89 33.29,6.37 33.29,5.64 34.16,4.78 37.08,4.78 | v46.15,9.22 46.15,7.04 43.89,4.78 37.08,4.78 | 37.08,4.78 JP2.4
N$1
  Top 0.254: U4.8 30.45,13.25 Y2.3
N$2
  Top 0.406: LED1.5 8.32,25.4 9.77,26.85 12.17,26.85 12.95,26.06 R1.2
N$3
  Top 0.406: LED1.6 9.32,27.1 9.57,27.34 13.74,27.34 R2.2
N$4
  Top 0.406: LED1.4 8.46,23.7 8.89,24.13 8.89,25.15 9.59,25.84 R3.2
N$5
  Top 0.203: TX.A 4.43,19.05 7.19,21.81 10.91,21.81 12.7,20.02 12.7,19.05 13.21,18.54 R5.2
N$6
  Top 0.203: RX.A 4.43,22.1 11.03,22.1 R12.2
N$7
  Top 0.203: R10.1 10.65,14.16 C16.2
N$8
  Top 0.254: U1.P$2 45.72,24.13 46.48,23.37 48.12,23.37 R14.1 48.88,24.65 49.38,25.15 50.32,25.15 50.62,25.45 50.62,26.2 R13.1
N$9
  Top 0.254: Y2.1 32.26,14.83 32.26,14.44 U4.7
N$10  (via drill 0.2)
  Top 0.203: v15.98,5.54 16.24,5.27 C10.1 | U2.44 22.45,10.25 22.95,10.75 23.22,10.75 23.29,10.82 | U2.20 15.5,9.05 14.61,8.16 v14.61,7.52 | C5.1 24.59,11.9 24.59,11.53 24.44,11.38 23.85,11.38 23.29,10.82 | 23.29,10.82 v23.29,10.63
  Route2 0.203: v23.29,10.63 23.16,10.76 22.44,10.76 20.73,9.04 15.49,9.04 14.61,8.15 v14.61,7.52 14.61,6.99 15.98,5.61 v15.98,5.54
N$11  (via drill 0.35)
  Top 0.254: v49.4,25.78 48.76,26.42 U1.P$7
  Top 0.305: R16.1 70.47,17.53 69.83,18.18 v69.83,18.34
  Bottom 0.305: v69.83,18.34 70.47,18.99 70.47,27.27 69.06,28.68 58.75,28.68 56.71,26.64 50.27,26.64 v49.4,25.78
N$12  (via drill 0.35)
  Top 0.254: U1.P$8 48.88,26.92 49.08,26.92 v49.4,26.59
  Top 0.305: R15.1 70.98,16.26 v70.26,16.26
  Bottom 0.305: v70.26,16.26 70.87,16.87 70.87,27.43 69.23,29.07 58.58,29.07 56.55,27.04 49.64,27.04 49.4,26.8 v49.4,26.59
N$13  (via drill 0.3)
  Top 0.203: U1.P$5 47.23,24.4 47.4,24.23 v47.4,24.13 | v43.59,21.61 43.59,22.59 THERM.2
  Bottom 0.203: v47.4,24.13 44.88,21.61 v43.59,21.61
N$14  (via drill 0.2)
  Top 0.203: C19.2 17.24,14.59 v17.24,14.7 | v17.02,17.53 17.14,17.4 R11.1
  Route2 0.203: v17.24,14.7 17.24,17.3 v17.02,17.53
N$15
  Top 0.305: DONE.C 72.14,23.33 72.14,17.78 72.39,17.53 R16.2
N$16
  Top 0.203: U1.P$13 46.33,29 46.33,29.36 46.77,29.8 48.28,29.8 R17.2
N$17
  Top 0.254: R15.2 74.05,17.02 74.05,19.69 74.06,19.7 74.06,26.3 CHRG/LBO.C
N$18
  Top 0.203: R20.2 49.38,29.51 46.98,29.51 46.73,29.25 U1.P$12
N$19
  Top 0.203: RST1.1 20.93,22.5 22.1,21.34 23.62,21.34 24.26,21.97 24.28,22 | U$8.9 24.39,22.1 24.28,22 | CPRST.TP 24.28,22
N$20
  Top 0.089: U3.3 57.66,19.54 57.66,19.56 58.67,20.57 65.28,20.57 68.58,23.88 L3.1
  pour Top (no thermals): 56.97,18.72 56.97,19.81 57.23,20.07 58.7,21.54 60.88,21.54 65.15,21.54 67.69,24.08 69.47,24.08 69.47,23.44 69.47,23.27 66.07,19.86 60.55,19.86 59.28,19.86 58.29,18.87 58.14,18.72
N$21
  Top 0.203: SFD.A 4.56,14.73 8.37,18.54 R18.2
N$22
  Top 0.305: R22.1 73.04,21.44 PWR.C
N$23
  Top 0.305: R24.1 51.86,14.99 | 51.86,14.99 R25.2 | U3.14 54.59,15.22 54.36,14.99 51.86,14.99
N$24
  Top 0.203: RXOK.A 5.2,18.54 7.95,18.54 8.28,18.87 8.28,19.45 8.64,19.81 R19.2
N$25
  Top 0.203: C34.1 21.46,14.86 20.45,13.85 U2.3
N$26
  Top 0.203: EXTCLK.P$4 21.52,17 arc45 C34.2
N$28
  Top 0.203: U5.5 C40.2
N$29
  Top 0.203: C36.1 28.57,24.89 U$8.16
N$30  (via drill 0.35, 0.4)
  Top 0.305: v51.59,18.24 U3.11
  Route15 0.305: v7.11,31.77 7.52,31.37 21.08,31.37 | v51.59,18.24 51.44,18.09 45.9,18.09 41.4,22.58 41.4,25.2 37.59,29.01 27.41,29.01 25.04,31.37 21.08,31.37 | 21.08,31.37 v21.08,30.76
  Bottom 0.305: U$15.P$2 9.89,32.07 9.23,32.07 8.94,31.77 v7.11,31.77 | v21.08,30.76 21.87,29.97 SJ2.2
N$31  (via drill 0.35)
  Top 0.203: R21.1 16.7,29.77 | v10.29,30.66 10.28,30.65
  Top 0.254: 16.7,29.77 v17.63,29.77 | 10.28,30.65 RXOK1.A
  Bottom 0.254: v17.63,29.77 17.12,29.26 11.68,29.26 v10.29,30.66
N$32
  Top 0.254: R23.1 19.19,30.48 14.34,30.48 SFD1.A
RED  (via drill 0.4, 0.5)
  Top 0.406: v4.67,25.15 4.42,25.4 LED1.2 | v35.33,11.61 34.65,10.92 33.94,10.92 33.85,11.01 33.33,11.01 U4.10
  Route2 0.406: v4.67,25.15 5.86,26.33 28.73,26.33 32.71,22.35 32.71,20.44 34.59,18.55 35.29,18.55 35.31,18.54 36.13,18.54 36.84,17.83 36.84,14.94 34.35,12.45 33.78,12.45 33.53,12.19 33.53,11.43 34.04,10.92 34.65,10.92 v35.33,11.61
RESET  (via drill 0.35, 0.4)
  Top 0.305: 43.28,18.7 43.28,19.43 v43.08,19.63
  Top 0.406: U4.29 43.28,18.7 43.53,18.95 RST.1 | RST.1 44.62,18.63 45.47,17.78 46.99,17.78 47.8,16.97 v47.8,16.94 | RST.1 45.51,19.84 45.51,19.85 46.34,20.68 C1.2 | v47.75,6.35 R.TP
  Route2 0.406: v47.8,16.94 47.8,6.4 v47.75,6.35
  Bottom 0.305: v43.08,19.63 36.77,19.63 X2.2
RF_N
  Top 0.192: U2.17 14.86,10.25 arc90 C14.2
RF_P
  Top 0.192: C13.2 arc90 14.86,10.65 U2.16
RX_LED  (via drill 0.3, 0.35)
  Top 0.203: v28.19,23.88 26.61,23.88 U$8.14
  Top 0.254: SFD1.C 11.82,29.17 v12.24,28.75
  Bottom 0.203: v12.24,28.75 12.24,26.87 13.42,25.69 20.71,25.69 21.21,26.2 27.65,26.2 28.19,25.65 v28.19,23.88
RXD  (via drill 0.35, 0.4)
  Top 0.254: U$8.21 24.89,27.18 25.49,27.77 33.44,27.77 36.32,24.89 v37.08,24.89
  Top 0.406: U4.30 39.55,16.08 v40.48,17
  Route2 0.406: v40.48,17 40.48,17.56 37.08,20.95 v37.08,24.89 FTDI.4
SCK  (via drill 0.2, 0.55)
  Top 0.203: U2.41 22.96,9.05 v23.13,9.22
  Top 0.406: v36.59,6.08 37.29,6.08 U4.17 | v43.43,11.68 S.TP 45.23,9.89 45.23,8.64 46.6,7.27 47.38,7.27 48.36,8.26 U$12.6
  Route2 0.254: v23.13,9.22 24.33,10.41 35.05,10.41 37.08,8.38 | 37.08,8.38 37.08,6.57 v36.59,6.08 | 37.08,8.38 38.86,8.38 42.16,11.68 v43.43,11.68
  Bottom 0.305: v36.59,6.08 34.54,4.03 JP2.3
SCL  (via drill 0.4)
  Top 0.254: U5.1 65.02,5.08 63.37,5.08 v63.09,5.36 | R26.1 44.29,16.71 v42.67,16.71
  Top 0.406: v42.67,16.71 42.42,16.71 U4.28
  Route15 0.406: v63.09,5.36 62.94,5.51 54.69,5.51 | 54.69,5.51 54.84,5.36 54.84,3.07 JP1.4 | 54.69,5.51 48.01,12.19 45.47,12.19 42.67,14.99 v42.67,16.71
SDA  (via drill 0.4)
  Top 0.254: U5.4 v67.31,4.83 | R27.1 44.41,15.1 v44.32,15.19
  Top 0.406: U4.27 42.03,15.19 v44.32,15.19
  Route2 0.406: v49.61,13.44 49.61,11.46 v48.46,10.31
  Route15 0.406: v67.31,4.83 64.75,4.83 63.18,6.4 60.25,6.4 59.74,6.91 55.03,6.91 49.06,12.89 | v44.32,15.19 45.85,13.66 48.28,13.66 49.06,12.89 | v48.46,10.31 53.29,5.49 53.29,4.01 JP1.3 | v49.61,13.44 49.06,12.89
TX_LED  (via drill 0.3)
  Top 0.203: RXOK1.C 8.52,29.32 | v27.53,24.38 U$8.15
  Top 0.254: v9.22,28.75 9.09,28.75 8.52,29.32
  Bottom 0.203: v9.22,28.75 12.57,25.4 20.83,25.4 21.34,25.91 27.53,25.91 27.9,25.53 27.9,25.15 27.53,24.78 v27.53,24.38
TXD
  Top 0.254: U$8.20 25.39,27.14 25.68,27.43 33.27,27.43 40.13,20.57
  Top 0.406: U4.31 40.13,17.81 40.13,20.57 38.61,22.1 38.61,30.1 FTDI.5
VBUS  (via drill 0.25, 0.35, 0.4, 0.7)
  Top 0.203: v12.45,22.35 12.7,22.1 RV3.1 | U$8.8 23.88,22.67 | 23.88,22.67 23.88,22.1 23.62,21.84 23.11,21.84 22.86,22.1 v22.78,22.1 | U$8.7 23.88,22.67
  Top 0.254: R13.2 49.74,28.08 v49.09,27.42
  Top 0.305: v46.48,24.21 46.48,24.7 | 46.48,24.7 U1.P$3 | 46.48,24.7 46.48,24.71 U1.P$4 | v49.1,27.43 v49.09,27.42 U1.P$9 | v71.12,28.45 71.12,27.21 CHRG/LBO.A DONE.A
  Top 0.406: C6.1 42.93,28.18 v42.93,26.92
  Bottom 0.254: 12.45,23.62 v12.45,22.35 | v22.78,22.1 22.1,21.41 22.1,21.34
  Bottom 0.305: v71.12,28.45 70.1,29.46 58.42,29.46 56.39,27.43 v49.1,27.43 49.07,27.43 48.31,26.67 48.31,26.04 v46.48,24.21 45.64,24.21 v42.93,26.92
  Bottom 0.61: J2.VBUS 8.81,16.69 10.41,18.29 10.41,23.11 10.92,23.62 12.45,23.62 19.81,23.62 22.1,21.34 22.35,21.08 29.72,21.08 37.86,29.23 42.15,29.23 42.93,28.45 v42.93,26.92
  pour Top (isolate 0.254, no thermals): 44.27,26.29 43.74,26.29 43.61,26.16 42.42,26.16 42.16,26.42 42.16,27.43 42.42,27.69 43.59,27.69 43.71,27.56 44.27,27.56
VCC-ISO  (via drill 0.4)
  Top 0.203: 43.94,25.15 43.94,25.6 U1.P$20
  Top 0.305: v42.16,25.07 43.87,25.07 43.94,25.15
  Top 0.61: C22.1 49.61,22.28 | 49.61,22.28 49.53,22.35 | C32.1 51.26,22.4 51.05,22.61 50.72,22.28 49.61,22.28
  Route15 0.305: v27.28,30.25 28.07,29.46 37.77,29.46 v42.16,25.07
  Bottom 0.305: U$15.P$3 9.39,31.67 24.38,31.67 | v27.28,30.25 25.86,31.67 24.38,31.67 | SJ2.1 24.38,31.67
  pour Top (no thermals): 44.3,26.06 43.89,26.06 43.31,25.48 43.31,24.74 46.08,21.97 53.49,21.97 53.77,21.69 53.77,20.68 54.1,20.68 54.1,21.69 54.38,21.97 62.59,21.97 63.88,23.27 63.88,24.08 62.1,24.08 61.14,23.11 46.35,23.11 45.36,24.1 45.36,24.99 44.32,24.99 44.32,26.04
VCOTUNE
  Top 0.203: U2.12 15.13,12.55 14.3,13.38 R10.2 13.78,14.16 13.61,14.33 13.61,14.72 13.46,14.86 12.55,14.86 12.4,14.72 11.43,14.72 C15.2
VDDCLK  (via drill 0.2)
  Top 0.203: U2.9 v18.03,13.39 | C19.1 16.32,14.16 v15.49,14.99 15.41,15.07 15.26,15.07 15.11,15.21 15.11,15.37 14.81,15.67 C7.1 14.51,15.67 C18.1
  Route15 0.203: v18.03,13.39 17.93,13.49 17.93,13.55 17.69,13.79 16.85,13.79 16.74,13.68 16,13.68 15.49,14.19 v15.49,14.99
VDDIF
  Top 0.203: U2.7 18.85,14.68 18.48,15.05 C9.1
VDDIO  (via drill 0.3)
  Top 0.203: U2.31 19.25,5.9 19.78,5.37 21.08,5.37 21.26,5.19 21.26,4.78 21.63,4.41 C4.1 | v24.94,5.59 24.36,5.59 R9.1 | TP3-OTP.P$1 25.98,10.9 25.98,8.97 v25.07,8.05 v25.06,8.05 24.91,8.19 R8.1 24.17,9.14 23.85,9.45 | C20.2 24.05,9.65 23.85,9.45 | U2.42 22.79,9.45 22.97,9.63 23.3,9.63 23.48,9.45 23.85,9.45
  Top 0.293: R9.1 C4.1
  Route15 0.203: v24.94,5.59 25.06,5.7 v25.06,8.05
VDDMS
  Top 0.203: U2.6 19.25,15.11 C8.1
VDDPA1  (via drill 0.2, 0.25)
  Top 0.203: U2.18 15.31,9.85 v15.24,9.78 | L1.1 13.9,5.84 v13.72,5.84
  Top 0.293: v11.88,7.88 11.84,7.88 C25.1
  Top 0.406: C23.1 C24.1 C25.1
  Route15 0.203: v15.24,9.78 15.24,9.2 14.43,8.38 13.66,8.38 | v11.88,7.88 12.18,7.88 12.68,8.38 13.66,8.38 | 13.66,8.38 13.66,5.89 v13.72,5.84
VDDPA2
  Top 0.203: U2.19 15.48,9.45 13.64,7.61 13.64,6.6 13.44,6.41 13.44,6.19 13.3,6.04 13.08,6.04 12.95,5.92 12.95,5.37 L2.1
  Top 0.293: C31.1 C27.1 | C28.1 C29.1
  Top 0.305: C29.1 11.8,3.95 C31.1 | C27.1 12.95,4.03 12.95,5.37
VDDSYN  (via drill 0.2)
  Top 0.203: U2.10 17.65,13.2 17.63,13.22 17.63,13.28 v17.53,13.39 | v15.49,12.96 15.16,13.29 15.16,14.72 15.01,14.86 14.73,14.86 14.63,14.86 13.95,14.86 C12.1
  Route15 0.203: v17.53,13.39 17.53,13.21 17.27,12.95 17.27,12.96 v15.49,12.96
VDDVCO  (via drill 0.2)
  Top 0.203: U2.11 17.25,13.09 17.12,13.22 17.12,13.28 v17.02,13.39
  Top 0.293: C16.1 C15.1 v11.15,16.97 C11.1
  Route15 0.203: v17.02,13.39 15.06,13.39 11.48,16.97 v11.15,16.97
VDELAY
  Top 0.203: U5.9 65.79,7.37 65.62,7.53 | 65.62,7.53 C39.1 | 67.56,7.89 R28.2 | U6.6 67.77,7.89 R28.2 | R28.2 67.16,7.99 67.04,7.99 | 67.04,7.99 66.45,8.59 66.45,9.6 TP3.P$1 | 65.62,7.53 66.08,7.99 67.04,7.99
VLIPO  (via drill 0.7)
  Top 0.089: B2.2 56.64,26.77 v56.64,29.97
  Top 0.305: C17.1 44.57,29.81 v44.55,29.79 | U1.P$14 U1.P$15
  pour Bottom: 45.11,29.21 44.98,29.08 44.12,29.08 43.76,29.44 43.76,30.08 43.76,30.09 44.42,30.76 57.07,30.76 57.45,30.38 57.45,29.59 57.07,29.21
  pour Top (no thermals): 44.32,27.79 43.79,27.79 43.36,28.22 43.33,28.24 43.33,29.11 43.76,29.54 43.76,29.87 43.76,30.1 44.2,30.53 44.86,30.53 44.93,30.45 45.36,30.02 45.36,29.64 45.36,28.88 44.32,28.88
  pour Top (no thermals): 57.12,28.73 56.13,28.73 56.13,29.18 55.78,29.54 55.78,30.4 56.13,30.76 57.07,30.76 57.45,30.38 57.45,29.59 57.12,29.26
VREF
  Top 0.203: U2.5 19.65,14.06 20.59,15 20.59,17.98 21.06,18.45 R6.2
WAKEUP  (via drill 0.2, 0.55)
  Top 0.203: v19,3.76 19.2,3.56 R4.1 | v15.35,7.38 15.44,7.46 15.44,7.63 15.66,7.85 U2.23
  Top 0.406: U4.11 33.02,9.57 33.02,9.04 33.02,8.85 32.62,8.45 32.62,7.99 33.53,7.08 33.53,6.55 v34.16,5.92
  Route2 0.203: v15.35,7.38 15.35,6.81 16.17,5.99 16.41,5.76 16.41,5.75 18.1,4.06 18.7,4.06 v19,3.76
  Route15 0.203: v19,3.76 19.25,3.51 20.09,3.51 21.84,1.75 24.11,1.75 25.65,3.29 25.66,3.29 27.11,4.75 31.69,4.75 33.13,6.19 33.89,6.19 v34.16,5.92

## Text on the board
tPlace: X | Z | Y | X | Z | Y
bPlace: X | Z | Y | I2C | P/U